# Altium PCB Concentrator.PcbDoc
Units mm, origin at the board's own origin, x right, y up, seen from the top; angles counter-clockwise.
Board outline 100 x 85 mm, 2 copper layers (Top Layer, Bottom Layer); 77 components, 63 nets, 269 pads, 33 vias.
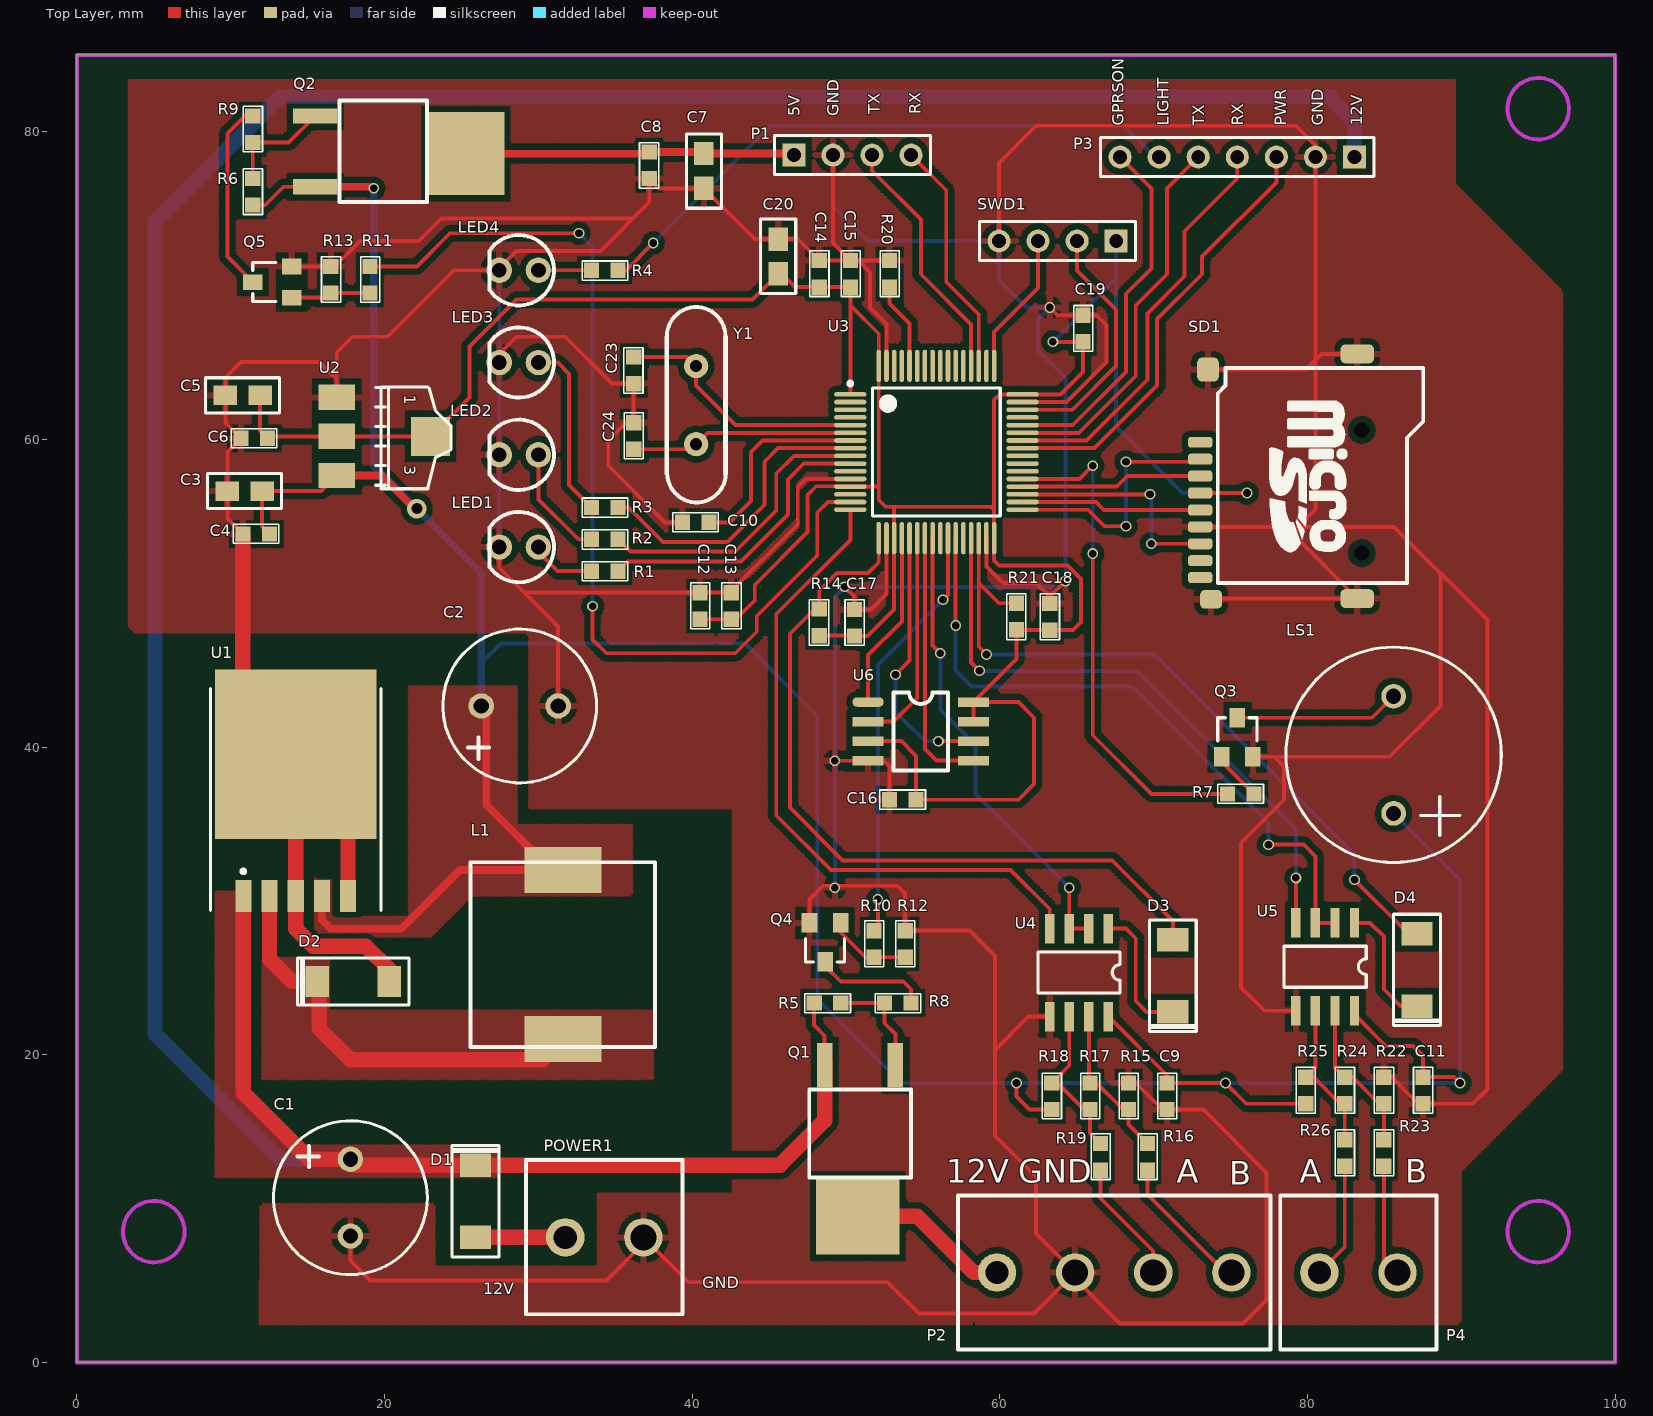
[diagram p0: Top Layer view]
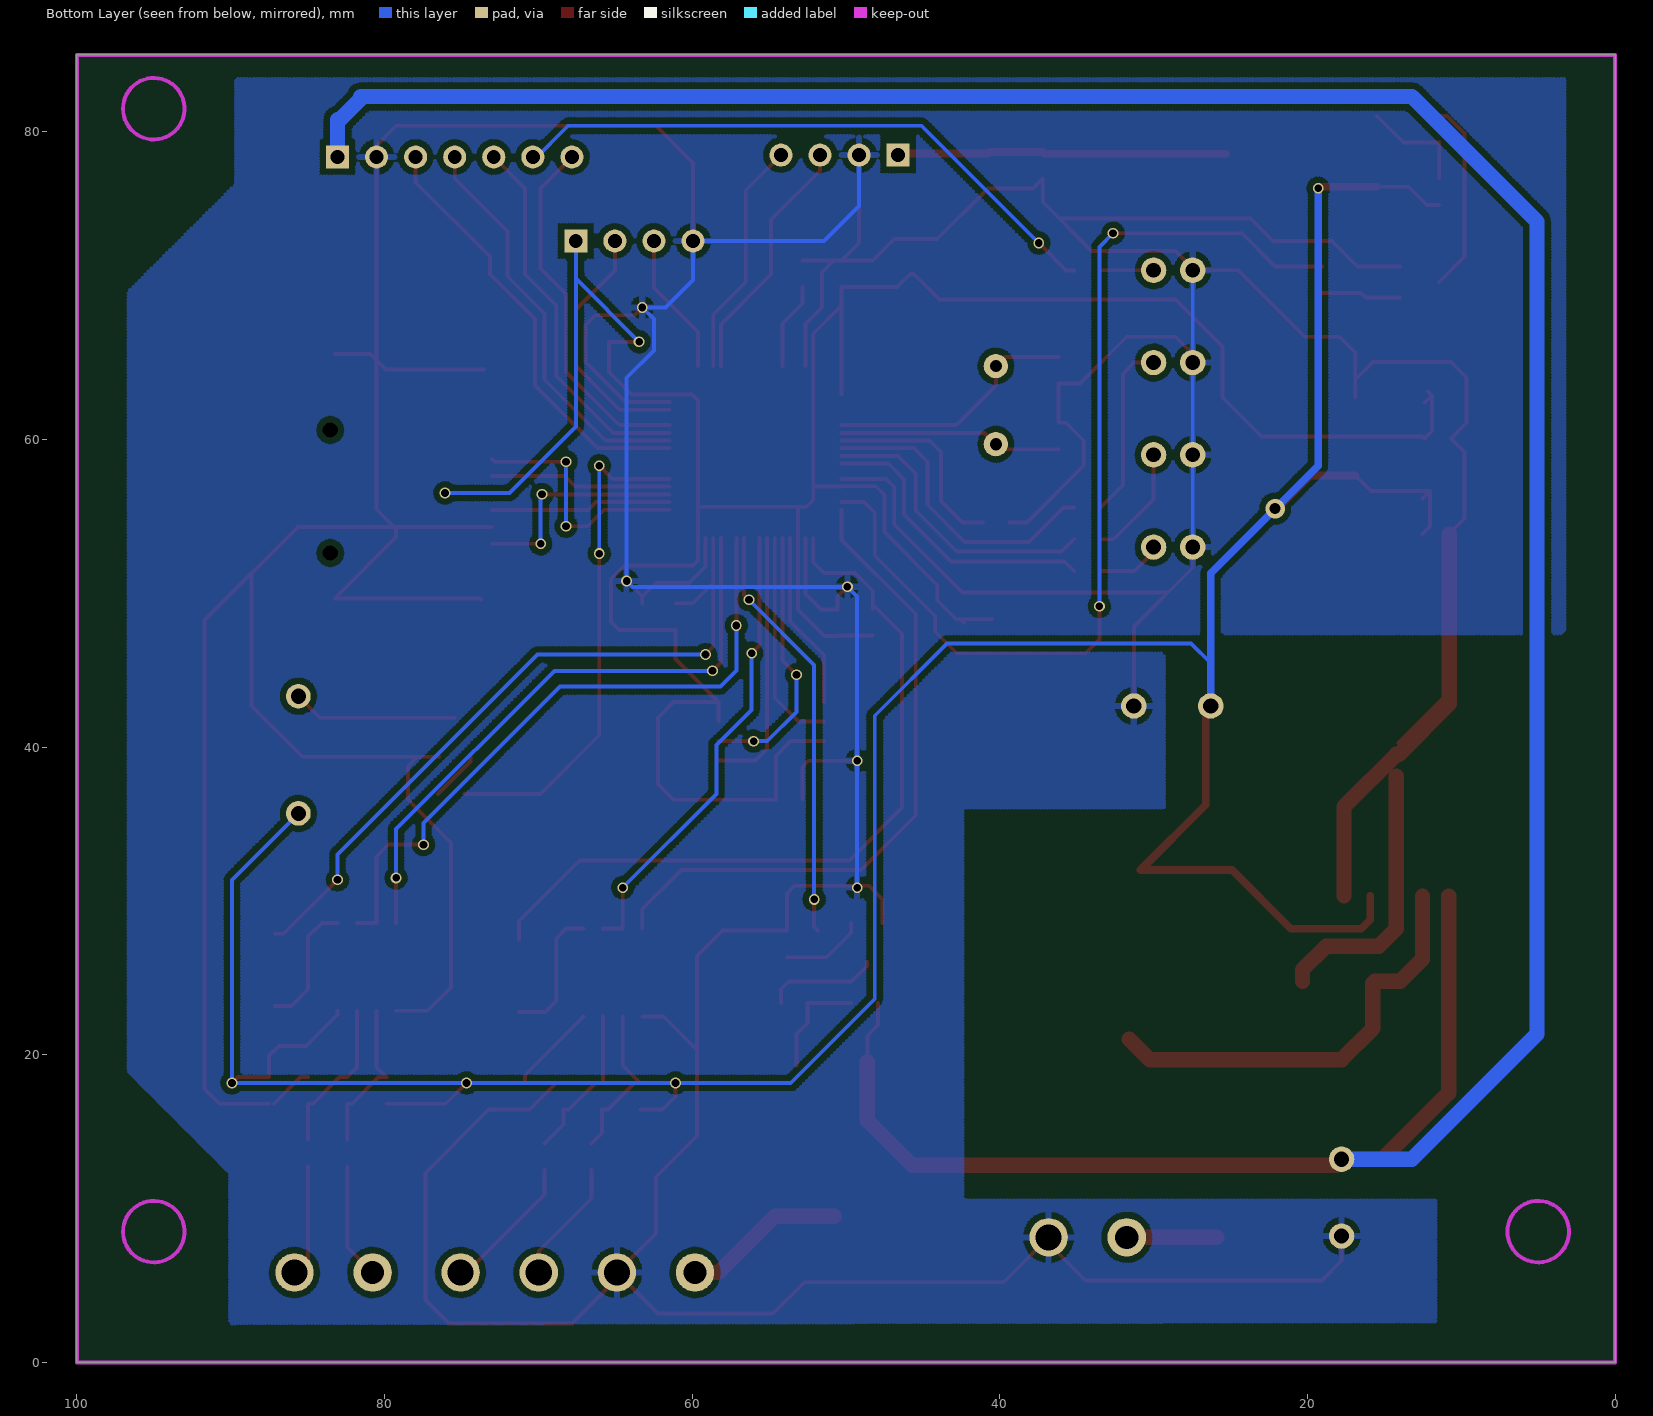
[diagram p1: Bottom Layer view, seen from below]

## Layer stack, top to bottom
Top Layer: signal copper 0.0356
Dielectric: dielectric 0.32, FR-4, Dk 4.8
Bottom Layer: signal copper 0.0356

## Board outline
0,0 0,85 100,85 100,0

## Design rules (kind name [scope] priority, off if disabled: settings)
Clearance [All] p1: gap=0.2
ComponentClearance [All] p1: gap=0.254 collisioncheckmode=3 verticalgap=0.254
PolygonConnect [All] p1: connectstyle=Relief reliefconductorwidth=0.4 reliefentries=4 polygonreliefangle="90 Angle"
RoutingVias [All] p1: holewidth=0.711 width=1.27 viastyle="Through Hole" minholewidth=0.5 minwidth=0.7 maxholewidth=0.711 maxwidth=1.27
SolderMaskExpansion [All] p1: expansion=0.102
TestPointUsage [All] p1: valid=0 allowmultiple=FALSE
Testpoint [All] p1: side=15 testpointundercomponent=TRUE minsize=1.016 maxsize=2.54 preferedsize=1.524 minholesize=0 maxholesize=1.016 preferedholesize=0.813 testpointgrid=0.025 style=1023 order=0-112345678
Width [All] p1: maxlimit=1 minlimit=0.2 preferedwidth=0.254
18 further rules are at their usual default settings.

## Components (designator, comment, footprint, x,y, rotation, side; value= is the part's Value field where it differs from the comment)
C1 "Cap Pol1" "C_DJ - duplicate" 17.78,13.208 r90 top
C2 "Cap Pol1" "C_DJ - duplicate" 26.289,42.672 r180 top
C3 "Cap" 0805 9.779,56.642 r0 top
C4 "Cap" 0603 10.795,53.848 r180 top
C5 "Cap" 0805 9.652,62.865 r0 top
C6 "Cap" 0603 10.668,60.071 r180 top
C7 "Cap" 0805 40.767,76.327 r90 top
C8 "Cap" 0603 37.211,76.962 r270 top
C9 "Cap" 0603 70.866,18.161 r90 top
C10 "Cap" 0603 39.37,54.61 r180 top
C11 "Cap" 0603 87.503,18.542 r90 top
C12 "Cap" 0603 40.513,50.038 r90 top
C13 "Cap" 0603 42.545,50.038 r90 top
C14 "Cap" 0603 48.26,71.628 r90 top
C15 "Cap" 0603 50.292,71.628 r90 top
C16 "Cap" 0603 52.832,36.576 r180 top
C17 "Cap" 0603 50.546,48.946 r90 top
C18 "Cap" 0603 63.246,49.327 r90 top
C19 "Cap" 0603 65.405,68.072 r90 top
C20 "Cap" 0805 45.593,73.025 r270 top
C23 "Cap" 0603 36.195,63.627 r270 top
C24 "Cap" 0603 36.195,61.087 r90 top
D1 "Diode 1N4007" M7-4007 25.908,8.128 r90 top
D2 "SS34" M7-4007 20.32,24.765 r180 top
D3 "M7" M7-4007 71.247,27.483 r270 top
D4 "M7" M7-4007 87.122,27.864 r270 top
L1 "Inductor" L12*12 37.592,32.512 r180 top
LED1 "LED" LED 30,53 r180 top
LED2 "LED" LED 30,59 r180 top
LED3 "LED" LED 30,65 r180 top
LED4 "LED" LED 30,71 r180 top
LS1 "Beep" BUZZER 85.598,43.307 r90 top
P1 "Header 4" HDR1X4 46.609,78.486 r0 top
P2 "Header 4" P4 59.817,5.842 r0 top
P3 "Header 7" HDR1X7 83.058,78.359 r180 top
P4 "Header 2" P2 80.772,5.842 r0 top
POWER1 "Header 2" P2 31.75,8.128 r0 top
Q1 "PMOS-2" 78M05/20 53.213,19.304 r180 top
Q2 "PMOS-2" 78M05/20 15.494,81.026 r270 top
Q3 "2N3904" NPN-PNP 74.422,39.37 r0 top
Q4 "2N3904" NPN-PNP 49.657,28.575 r180 top
Q5 "2N3904" NPN-PNP 13.97,69.215 r90 top
R1 "Res2" 0603 35.179,51.435 r0 top
R2 "Res2" 0603 35.179,53.509 r0 top
R3 "Res2" 0603 35.179,55.584 r0 top
R4 "Res2" 0603 35.179,70.993 r0 top
R5 "Res2" 0603 49.657,23.368 r0 top
R6 "Res2" 0603 11.43,76.962 r90 top
R7 "Res2" 0603 74.803,36.957 r180 top
R8 "Res2" 0603 54.229,23.368 r0 top
R9 "Res2" 0603 11.43,81.026 r90 top
R10 "Res2" 0603 51.816,28.067 r90 top
R11 "Res2" 0603 19.05,71.247 r90 top
R12 "Res2" 0603 53.848,28.067 r90 top
R13 "Res2" 0603 16.51,71.247 r90 top
R14 "Res2" 0603 48.26,47.244 r270 top
R15 "Res2" 0603 68.368,18.161 r90 top
R16 "Res2" 0603 69.596,14.224 r90 top
R17 "Res2" 0603 65.871,18.161 r90 top
R18 "Res2" 0603 63.373,18.161 r90 top
R19 "Res2" 0603 66.548,14.224 r90 top
R20 "Res2" 0603 52.832,71.628 r90 top
R21 "Res2" 0603 61.087,47.625 r270 top
R22 "Res2" 0603 84.963,18.542 r90 top
R23 "Res2" 0603 84.963,14.478 r90 top
R24 "Res2" 0603 82.423,18.542 r90 top
R25 "Res2" 0603 79.883,18.542 r90 top
R26 "Res2" 0603 82.423,14.478 r90 top
SD1 "SD_Card_TF" SD_Card_TF 73.025,59.817 r270 top
SWD1 "SWD" HDR1X4 67.564,72.898 r180 top
U1 "LM2596S-5.0" TO-263-5 14.224,34.544 r0 top
U2 "AMS1117-3.3" AMS-1117 16.891,62.738 r270 top
U3 "STM32F103RBT6" LQFP64_M 55.88,59.182 r0 top
U4 "SP485" SOP8 67.056,28.194 r180 top
U5 "SP485" SOP8 83.058,28.575 r180 top
U6 "W25X16" W24X16 51.435,42.926 r0 top
Y1 "XTAL" OSC 40.259,59.69 r270 top

## Footprints (in the part's own frame and the unit in brackets; to place one, negate y for a bottom-side part, rotate by r counter-clockwise, add the part's x,y. Pads: shape width x height; smd on the part's side, far side on the other; paste and mask are expansions set on the pad)
78M05/20 [mm]
  rect 1x2.9 smd: 1(0,0) 3(4.6,0)
  rect 5.4x5 smd: 2(2.45,9.8)
  silkscreen extent -1,1.57 5.6,7.27
0603 [mil]
  rect 39x39 smd: 1(0,0) 2(-68,0)
  silkscreen extent -92,-25 25,24
0805 [mil]
  rect 60x50 smd: 1(0,0) 2(89.02,0)
  silkscreen extent -51,-45 139,45
AMS-1117 [mil]
  rect 65x94.49 smd: 1(0,0) 2(100,0) 3(200,0)
  rect 100x100 smd: 4(100,240)
  silkscreen extent -26,100 234,293
BUZZER [mm]
  round 1.6 hole 0.991: 1(0,0) 2(-7.62,0)
  silkscreen extent -10.81,-7 3.19,7
"C_DJ - duplicate" [mil]
  round 65 hole 39: 1(0,0) 2(-196.85,0)
  silkscreen extent -295,-197 98,197
HDR1X4 [mm] "Connector; Header; 4 Position"
  rect 1.5x1.5 hole 0.9: 1(0,0)
  round 1.5 hole 0.9: 2(2.54,0) 3(5.08,0) 4(7.62,0)
  silkscreen extent -1.27,-1.27 8.89,1.27
HDR1X7 [mm] "Connector; Header; 7 Position"
  rect 1.5x1.5 hole 0.9: 1(0,0)
  round 1.5 hole 0.9: 2(2.54,0) 3(5.08,0) 4(7.62,0) 5(10.16,0) 6(12.7,0) 7(15.24,0)
  silkscreen extent -1.27,-1.27 16.51,1.27
L12*12 [mm]
  rect 5x3 smd: 1(6,11.5) 2(6,0.5)
  silkscreen extent 0,0 12,12
LED [mil]
  round 65 hole 38: A(0,0) K(100,0)
  silkscreen extent -40,-90 125,90
LQFP64_M [mm] "Thin QFP, 64-Leads, Body 10x10mm, Pitch 0.5mm, IPC Low Density"
  oval 2.1x0.3 smd: 1(-5.6,3.75) 2(-5.6,3.25) 3(-5.6,2.75) 4(-5.6,2.25) 5(-5.6,1.75) 6(-5.6,1.25) 7(-5.6,0.75) 8(-5.6,0.25) 9(-5.6,-0.25) 10(-5.6,-0.75) 11(-5.6,-1.25) 12(-5.6,-1.75) 13(-5.6,-2.25) 14(-5.6,-2.75) 15(-5.6,-3.25) 16(-5.6,-3.75) 33(5.6,-3.75) 34(5.6,-3.25) 35(5.6,-2.75) 36(5.6,-2.25) 37(5.6,-1.75) 38(5.6,-1.25) 39(5.6,-0.75) 40(5.6,-0.25) 41(5.6,0.25) 42(5.6,0.75) 43(5.6,1.25) 44(5.6,1.75) 45(5.6,2.25) 46(5.6,2.75) 47(5.6,3.25) 48(5.6,3.75)
  oval 0.3x2.1 smd: 17(-3.75,-5.6) 18(-3.25,-5.6) 19(-2.75,-5.6) 20(-2.25,-5.6) 21(-1.75,-5.6) 22(-1.25,-5.6) 23(-0.75,-5.6) 24(-0.25,-5.6) 25(0.25,-5.6) 26(0.75,-5.6) 27(1.25,-5.6) 28(1.75,-5.6) 29(2.25,-5.6) 30(2.75,-5.6) 31(3.25,-5.6) 32(3.75,-5.6) 49(3.75,5.6) 50(3.25,5.6) 51(2.75,5.6) 52(2.25,5.6) 53(1.75,5.6) 54(1.25,5.6) 55(0.75,5.6) 56(0.25,5.6) 57(-0.25,5.6) 58(-0.75,5.6) 59(-1.25,5.6) 60(-1.75,5.6) 61(-2.25,5.6) 62(-2.75,5.6) 63(-3.25,5.6) 64(-3.75,5.6)
  silkscreen extent -5.72,-4.15 4.15,4.57, body extent -5,-5 5,5, height 1.6
M7-4007 [mil]
  rect 60x80 smd: 1(0,0) 2(185,0)
  silkscreen extent -50,-60 235,60
NPN-PNP [mil]
  rect 40x50 smd: B(0,0) C(40,100) E(80,0)
  silkscreen extent -10,40 90,100
OSC [mil]
  round 62 hole 31: 1(0,0) 2(-200,0)
  silkscreen extent -351,-75 149,76
P2 [mm]
  round 2.5 hole 1.5: 1(0,0)
  round 2.5 hole 1.7: 2(5.08,0)
  silkscreen extent -2.54,-5 7.62,5.02
P4 [mm]
  round 2.5 hole 1.5: 1(0,0)
  round 2.5 hole 1.7: 2(5.08,0) 3(10.16,0) 4(15.24,0)
  silkscreen extent -2.54,-5 17.78,5.02
SD_Card_TF [mil]
  rrect50% 48x86 smd: 0(-226,402) 0(400,402)
  rrect50% 62x56 smd: 0(-186,20)
  round 30 hole 39.37 mask+0: 0(-31.5,413.39) 0(283.46,413.39)
  rrect50% 48x56 smd: 0(402,28)
  rrect50% 28x62 smd: 1(0,0) 2(43.31,0) 3(86.61,0) 4(129.92,0) 5(173.23,0) 6(216.54,0) 7(259.84,0) 8(303.15,0) 9(346.46,0)
  silkscreen extent -190,45 360,571, body extent -235,-27 407,572, height 79
SOP8 [mil]
  rect 24x76 smd: 1(0,0) 2(50,0) 3(100,0) 4(150,0) 5(150,225) 6(100,225) 7(50,225) 8(0,225)
  silkscreen extent -30,60 180,165
TO-263-5 [mm]
  rect 1.05x2.1 smd: 1(-3.4,-4.225) 2(-1.7,-4.225) 3(0,-4.225) 4(1.7,-4.225) 5(3.4,-4.225)
  rect 10.5x11 smd: 6(0,4.987)
  silkscreen extent -5.55,-5.18 5.55,9.28, body extent -5.33,-4.7 5.33,10.29, height 3
W24X16 [mil]
  oval 80x24 smd: 1(0,0)
  rect 80x24 smd: 2(0,-50.06) 3(0,-100.06) 4(0,-150.06) 5(270,-150) 6(270,-100) 7(270,-50) 8(270,0)
  silkscreen extent 65,-175 205,25

## Part data
C1 C2: "Polarized Capacitor (Radial)"
C3 C4 C5 C6 C7 C8 C9 C10 C11 C12 C13 C14 C15 C16 C17 C18 C19 C20 C23 C24: "Capacitor"
D1: "1 Amp General Purpose Rectifier"
D2 D3 D4: library part "Diode 1N4007", "1 Amp General Purpose Rectifier"
LED1 LED2 LED3 LED4: library part LED0, "Typical INFRARED GaAs LED"
LS1: library part Bell, "Electrical Bell"
P1 P2: "Header, 4-Pin"
P3: "Header, 7-Pin"
P4 POWER1: "Header, 2-Pin"
Q1 Q2: "P-Channel Power MOSFET"
Q3 Q4 Q5: "NPN General Purpose Amplifier"
R1 R2 R3 R4 R5 R6 R7 R8 R9 R10 R11 R12 R13 R14 R15 R16 R17 R18 R19 R20 R21 R22 R23 R24 R25 R26: "Resistor"
SD1: "SD"
SWD1: library part "Header 4", "Header, 4-Pin"
U1: "5V稳压芯片"
U3: "STM32 ARM-based 32-bit MCU with 128 Kbytes Flash, 64-pin LQFP, Industrial Temperature"
U4 U5: library part Pro55.tmp_SP485_20
U6: library part W24X16
Y1: "Crystal Oscillator"

## Via types
v1: diameter 0.7, hole 0.5, Top Layer to Bottom Layer, 32 vias
v2: diameter 1.27, hole 0.711, Top Layer to Bottom Layer, 1 vias

## Nets (pads, with @x,y where several pads share a name; then routed paths per layer and width w, separated by ;. In a path a pad name is that pad's centre, name@x,y a point inside that pad or via, vN(x,y) a via of type N, cw(c..) or ccw(c..) an arc to the next point about the centre after c; other vN are vias at no path point)
12V/485: P2.1 Q1.2 | length 10.6
  Top Layer w1: Q1.2 54.631,9.504 58.293,5.842 P2.1
485_CTRL: U3.27 U5.2 U5.3 | length 43.4
  Top Layer w0.254: v1(57.13,47.899) U3.27 ; v1(77.47,33.655) 79.756,33.655 80.518,32.893 U5.3 U5.2
  Bottom Layer w0.254: v1(57.13,47.899) 57.13,44.978 58.166,43.942 68.58,43.942 77.47,35.052 v1(77.47,33.655)
485_CTRL2: U3.24 U4.2 U4.3 | length 30.3
  Top Layer w0.254: U3.24 55.63,46.605 v1(56.134,46.101) ; v1(64.516,30.861) U4.3 U4.2
  Bottom Layer w0.254: v1(56.134,46.101) 56.134,42.418 58.42,40.132 58.42,36.957 v1(64.516,30.861)
485A: P4.1 R26.2 | length 7.6
  Top Layer w0.254: P4.1 82.423,7.493 R26.2
485A2: P2.3 R19.2 | length 8.1
  Top Layer w0.254: R19.2 66.548,10.668 69.977,7.239 P2.3
485B: P4.2 R23.2 | length 7.3
  Top Layer w0.254: R23.2 84.963,6.731 P4.2
485B2: P2.4 R16.2 | length 9.1
  Top Layer w0.254: R16.2 69.596,10.922 74.676,5.842 P2.4
485POW_CTRL: R10.1 U3.26 | length 27.5
  Top Layer w0.254: R10.1 52.07,28.321 v1(52.07,30.099) ; v1(56.307,49.576) 56.63,49.899 U3.26
  Bottom Layer w0.254: v1(52.07,30.099) 52.07,45.339 v1(56.307,49.576)
BEEP: R7.1 U3.37 | length 32.8
  Top Layer w0.254: U3.37 65.179,57.432 v1(66.04,58.293) ; v1(66.04,52.578) 66.04,40.767 69.85,36.957 R7.1
  Bottom Layer w0.254: v1(66.04,52.578) v1(66.04,58.293)
GND: C1.2 C2.2 C3.1 C4.1 C5.1 C6.1 C7.1 C8.1 C9.2 C10.1 C11.2 C12.1 C13.1 C14.1 C15.1 C16.1 C17.1 C18.1 C19.1 C20.1 C23.1 C24.1 D2.1 LED1.K LED2.K LED3.K LED4.K P1.2 P2.2 P3.2 POWER1.2 Q3.E Q4.E Q5.E R12.1 R13.1 R15.1 R20.1 R22.1 SD1.0@73.533,64.541 SD1.0@73.736,49.606 SD1.0@83.236,49.657 SD1.0@83.236,65.557 SD1.6 SWD1.4 U1.3 U1.5 U1.6 U2.1 U3.12 U3.18 U3.31 U3.47 U3.63 U4.5 U5.5 U6.4 | length 655.4
  Top Layer w0.254: U1.6@10.795,43.561 U1.6@14.097,40.259 ; C4.1 9.779,54.864 9.779,59.182 C6.1 9.652,61.087 9.652,64.008 10.668,65.024 15.748,65.024 16.891,63.881 ; Q5.E 16.764,71.247 18.415,72.898 22.225,72.898 23.685,74.358 36.131,74.358 ; U2.1 16.891,65.659 17.907,66.675 20.193,66.675 24.518,71 LED4.K 27.46,71.148 28.575,72.263 34.036,72.263 37.211,75.438 C8.1 37.846,76.327 C7.1 44.069,73.025 46.863,73.025 C14.1 R20.1 ; C1.2 17.78,6.604 19.05,5.334 34.417,5.334 36.83,7.747 POWER1.2 39.751,5.207 52.705,5.207 54.737,3.175 62.23,3.175 P2.2 ; LED1.K 27.46,51.661 31.289,47.832 C2.2 C2.2@31.369,42.752 ; LED3.K 27.46,65.56 28.575,66.675 31.75,66.675 34.798,63.627 C23.1 C24.1 35.687,61.087 34.544,59.944 34.544,58.293 38.227,54.61 C10.1 ; 29.083,50.038 42.418,50.038 46.863,54.483 46.863,56.896 47.399,57.432 U3.12 ; Q4.E 47.625,30.099 48.514,30.988 53.34,30.988 53.848,30.48 R12.1 58.039,28.067 59.69,26.416 59.69,14.732 62.357,12.065 62.357,8.382 P2.2 ; P1.2 49.149,72.771 C15.1 ; v1(49.276,39.116) 49.278,39.114 52.453,39.114 52.832,38.735 C16.1 ; v1(49.911,50.419) 50.546,49.784 C17.1@50.546,48.895 ; C17.1 51.613,48.946 52.63,49.963 U3.18 ; 50.8,71.628 51.562,70.866 51.562,68.58 52.63,67.512 U3.63 ; U3.31 59.13,51.741 60.198,50.673 62.357,50.673 C18.1@63.246,49.784 ; 59.69,20.32 61.849,22.479 U4.5 ; SWD1.4 59.944,77.978 62.357,80.391 79.248,80.391 80.518,79.121 ; U3.47 64.337,62.432 66.929,65.024 66.929,67.437 66.294,68.072 63.754,68.072 v1(63.246,68.58) ; C18.1 C18.1@63.246,49.784 ; v1(64.262,50.8) C18.1@63.246,49.784 ; R15.1 68.834,18.161 70.561,16.434 73.228,16.434 77.343,12.319 77.343,4.064 75.819,2.54 67.818,2.54 64.897,5.461 P2.2 ; SD1.6 85.637,54.317 91.694,48.26 91.694,17.78 90.729,16.815 C11.2 ; SD1.0@73.533,64.541 79.908,64.541 80.924,65.557 SD1.0@83.236,65.557 ; SD1.0@73.736,49.606 73.787,49.657 83.236,49.657 79.248,53.645 79.248,54.317 ; Q3.E 85.344,39.37 88.646,42.672 88.646,51.308 ; 77.851,39.37 78.486,38.735 78.486,36.576 75.692,33.782 75.692,24.384 77.216,22.86 U5.5 ; 79.375,54.317 80.518,55.46 P3.2 ; R22.1 85.471,18.542 C11.2@87.198,16.815
  Top Layer w1: C4.1 10.795,42.799 U1.6@14.097,39.497 ; U1.6@14.224,38.1 14.224,28.194 15.367,27.051 18.796,27.051 20.32,25.527 D2.1 ; U1.6 17.624,36.131 U1.5
  Bottom Layer w0.254: LED1.K LED4.K ; P1.2 49.149,75.184 51.435,72.898 SWD1.4 59.944,70.358 61.722,68.58 v1(63.246,68.58) 62.484,67.818 62.484,65.786 64.262,64.008 v1(64.262,50.8) 63.881,50.419 v1(49.911,50.419) 49.276,49.784 v1(49.276,30.861)
GPRS_RX: P3.4 U3.42 | length 26.6
  Top Layer w0.254: U3.42 65.647,59.932 69.596,63.881 69.596,68.199 72.009,70.612 72.009,73.533 75.438,76.962 P3.4
GPRS_TX: P3.5 U3.43 | length 24.8
  Top Layer w0.254: U3.43 65.131,60.432 68.834,64.135 68.834,68.707 70.866,70.739 70.866,76.327 P3.5
GPRSPWR_CTRL: P3.3 U3.41 | length 28.5
  Top Layer w0.254: U3.41 66.163,59.432 70.231,63.5 70.231,67.818 73.152,70.739 73.152,71.882 77.978,76.708 P3.3
GPRSPWRKEY: P3.7 U3.44 | length 23.6
  Top Layer w0.254: U3.44 64.742,60.932 68.199,64.389 68.199,69.469 69.85,71.12 69.85,76.327 P3.7
LED1: R1.1 U3.10 | length 19.3
  Top Layer w0.254: R1.1 35.814,52.07 43.18,52.07 46.228,55.118 46.228,57.404 47.256,58.432 U3.10
LED2: R2.1 U3.9 | length 19.4
  Top Layer w0.254: R2.1 35.983,52.705 42.799,52.705 45.466,55.372 45.466,57.785 46.613,58.932 U3.9
LED3: R3.1 U3.8 | length 20.2
  Top Layer w0.254: R3.1 35.856,55.584 38.1,53.34 42.291,53.34 44.704,55.753 44.704,58.547 45.589,59.432 U3.8
LORA_5V: C7.2 C8.2 P1.1 Q2.2 | length 27.6
  Top Layer w0.254: C7.2@40.869,78.486 C7.2 ; P1.1 46.507,78.588 C7.2 ; C7.2 40.666,78.689 C7.2
  Top Layer w0.5: Q2.2 37.098,78.576 C8.2 40.666,78.689 C7.2 P1.1@46.507,78.588
LORA_RX: P1.4 U3.51 | length 15.5
  Top Layer w0.254: P1.4 56.515,76.2 56.515,70.231 58.63,68.116 U3.51
LORA_TX: P1.3 U3.52 | length 16.4
  Top Layer w0.254: P1.3 51.689,77.47 54.864,74.295 54.864,70.739 58.13,67.473 U3.52
LORAPOW_CTRL: R11.1 U3.15 | length 64.7
  Top Layer w0.254: R11.1 22.098,71.247 24.257,73.406 v1(32.639,73.406) ; v1(33.528,49.149) 33.528,46.99 34.417,46.101 42.799,46.101 44.196,47.498 44.196,48.514 48.133,52.451 48.133,55.245 48.82,55.932 U3.15
  Bottom Layer w0.254: v1(32.639,73.406) 33.528,72.517 v1(33.528,49.149)
NetC10_2: C10.2 U3.7 | length 13.3
  Top Layer w0.254: C10.2 42.418,54.61 43.815,56.007 43.815,59.182 44.577,59.944 50.268,59.944 U3.7
NetC23_2: C23.2 U3.5 Y1.2 | length 16.7
  Top Layer w0.254: C23.2 39.675,65.354 Y1.2 40.259,63.5 42.827,60.932 U3.5
NetC24_2: C24.2 U3.6 Y1.1 | length 14.5
  Top Layer w0.254: C24.2 39.929,59.36 41.001,60.432 U3.6
NetD1_1: D1.1 POWER1.1 | length 5.8
  Top Layer w1: D1.1 POWER1.1
NetD2_2: D2.2 L1.1 U1.2 | length 28.1
  Top Layer w1: U1.2 12.524,26.211 13.97,24.765 D2.2 15.748,24.638 15.748,21.717 17.78,19.685 30.265,19.685 L1.1
NetD3_2: D3.2 U4.1 | length 8.8
  Top Layer w0.254: U4.1 68.199,28.194 68.834,27.559 68.834,23.495 69.545,22.784 D3.2
NetD4_2: D4.2 U5.1 | length 8.3
  Top Layer w0.254: U5.1 84.074,28.575 84.963,27.686 84.963,24.257 86.055,23.165 D4.2
NetLED1_A: LED1.A R1.2 | length 4.3
  Top Layer w0.254: LED1.A 30,52.677 31.242,51.435 R1.2
NetLED2_A: LED2.A R2.2 | length 7.4
  Top Layer w0.254: LED2.A 30,56.106 32.597,53.509 R2.2
NetLED3_A: LED3.A R3.2 | length 11.6
  Top Layer w0.254: LED3.A 31.266,65 32.004,64.262 32.004,57.031 R3.2
NetLED4_A: LED4.A R4.2 | length 3.5
  Top Layer w0.254: LED4.A 33.445,71 R4.2
NETLIGHT: P3.6 R4.1 | length 40.4
  Top Layer w0.254: R4.1 35.687,70.993 v1(37.465,72.771)
  Bottom Layer w0.254: v1@37.401,72.707 45.085,80.391 68.072,80.391 70.358,78.105 P3.6
NetLS1_1: LS1.1 Q3.C | length 10.7
  Top Layer w0.254: Q3.C 84.201,41.91 LS1.1
NetQ1_1: Q1.1 R5.1 R8.2 | length 7.2
  Top Layer w0.254: R5.1 R8.2 52.502,22.047 53.213,21.336 Q1.1
NetQ2_1: Q2.1 R6.1 R9.2 | length 7.1
  Top Layer w0.254: R6.1 R9.2 13.767,79.299 Q2.1
NetQ3_B: Q3.B R7.2 | length 3.3
  Top Layer w0.254: Q3.B 74.422,39.065 R7.2
NetQ4_B: Q4.B R10.2 R12.2 | length 5.5
  Top Layer w0.254: Q4.B 49.657,27.94 51.257,26.34 R12.2
NetQ4_C: Q4.C R8.1 | length 7.4
  Top Layer w0.254: Q4.C 48.641,25.781 49.657,24.765 53.721,24.765 54.229,24.257 R8.1
NetQ5_B: Q5.B R11.2 R13.2 | length 5.2
  Top Layer w0.254: Q5.B 16.205,69.215 R13.2 R11.2
NetQ5_C: Q5.C R9.1 | length 12.5
  Top Layer w0.254: Q5.C 9.779,71.882 9.779,79.883 10.922,81.026 R9.1
NetR15_2: R15.2 R16.1 R17.1 U4.7 | length 10.3
  Top Layer w0.254: U4.7 65.786,18.246 R17.1 66.294,18.161 68.021,16.434 R15.2 68.368,15.452 R16.1
NetR17_2: R17.2 R18.1 R19.1 U4.6 | length 10.5
  Top Layer w0.254: U4.6 64.516,19.304 R18.1 63.754,18.161 65.481,16.434 R17.2 65.871,14.901 R19.1
NetR20_2: R20.2 U3.60 | length 5.7
  Top Layer w0.254: R20.2 52.832,68.834 54.13,67.536 U3.60
NetR22_2: R22.2 R23.1 R24.1 U5.7 | length 10.2
  Top Layer w0.254: U5.7 81.788,19.177 R24.1 82.931,18.542 84.658,16.815 R22.2 R23.1
NetR24_2: R24.2 R25.1 R26.1 U5.6 | length 10.2
  Top Layer w0.254: U5.6 80.518,19.177 R25.1 80.391,18.542 82.118,16.815 R24.2 R26.1
SPI1_MISO: U3.22 U6.2 | length 14.2
  Top Layer w0.254: U6.2 53.084,41.654 54.63,43.2 U3.22
SPI1_MOSI: U3.23 U6.5 | length 17.2
  Top Layer w0.254: U3.23 55.13,39.866 55.88,39.116 U6.5
SPI1_NSS: U3.20 U6.1 | length 11.6
  Top Layer w0.254: U6.1 51.435,45.974 53.63,48.169 U3.20
SPI1_SCK: U3.21 U6.6 | length 17.5
  Top Layer w0.254: v1(53.213,44.704) 54.13,45.621 U3.21 ; v1(56.007,40.386) U6.6
  Bottom Layer w0.254: v1(53.213,44.704) 53.213,42.291 55.118,40.386 v1(56.007,40.386)
SPI2_MISO: SD1.7 U3.35 | length 14.7
  Top Layer w0.254: U3.35 v1(69.767,56.432) ; v1(69.85,53.213) 69.854,53.217 SD1.7
  Bottom Layer w0.254: v1(69.767,56.432) 69.85,56.349 v1(69.85,53.213)
SPI2_MOSI: SD1.3 U3.36 | length 11.8
  Top Layer w0.254: U3.36 67.6,56.932 68.285,57.617 SD1.3
SPI2_NSS: SD1.2 U3.33 | length 16.3
  Top Layer w0.254: U3.33 65.726,55.432 66.802,54.356 v1(68.199,54.356) ; v1(68.199,58.547) 72.855,58.547 SD1.2
  Bottom Layer w0.254: v1(68.199,54.356) v1(68.199,58.547)
SPI2_SCK: SD1.5 U3.34 | length 11.8
  Top Layer w0.254: U3.34 66.242,55.932 66.757,55.417 SD1.5
SWCLK: SWD1.3 U3.49 | length 9.3
  Top Layer w0.254: U3.49 59.63,66.996 62.484,69.85 SWD1.3
SWDIO: SWD1.2 U3.46 | length 16.4
  Top Layer w0.254: U3.46 64.726,61.932 67.564,64.77 67.564,68.453 65.024,70.993 SWD1.2
USART2_RX: D3.1 R14.2 U3.17 | length 50.3
  Top Layer w0.254: R14.2@48.108,49.124 46.355,47.371 46.355,36.068 49.784,32.639 67.31,32.639 71.247,28.702 D3.1 ; R14.2 48.26,50.165 49.403,51.308 51.435,51.308 52.13,52.003 U3.17
USART2_TX: U3.16 U4.4 | length 43.4
  Top Layer w0.254: U3.16 50.28,53.455 45.466,48.641 45.466,35.56 49.022,32.004 60.706,32.004 63.246,29.464 U4.4
USART3_RX: D4.1 R21.2 U3.30 | length 47.2
  Top Layer w0.254: 58.63,50.673 59.951,49.352 R21.2 ; U3.30 58.63,46.526 v1(59.14,46.016) ; v1(83.058,31.369) 86.563,27.864 D4.1
  Bottom Layer w0.254: v1(59.14,46.016) 70.062,46.016 83.058,33.02 v1(83.058,31.369)
USART3_TX: U3.29 U5.4 | length 39.8
  Top Layer w0.254: U3.29 58.13,45.502 v1(58.674,44.958) ; U5.4 v1(79.248,31.496)
  Bottom Layer w0.254: v1(58.674,44.958) 68.961,44.958 79.248,34.671 v1(79.248,31.496)
VCC_3.3: C5.2 C6.2 C12.2 C13.2 C14.2 C15.2 C16.2 C17.2 C18.2 C19.2 C20.2 R14.1 R21.1 SD1.4 SWD1.1 U2.2 U2.4 U3.1 U3.13 U3.19 U3.32 U3.48 U3.64 U6.3 U6.7 U6.8 | length 202.2
  Top Layer w0.254: C5.2@12.167,63.119 C5.2 ; C6.2 11.913,60.553 C5.2 ; C5.2@12.395,62.383 C5.2 ; C6.2@12.522,60.198 U2.4 25.527,62.738 25.527,66.04 28.575,69.088 43.917,69.088 C20.2 45.822,70.764 46.685,69.901 C15.2 C15.2@50.292,69.889 ; C12.2 42.85,48.311 44.069,49.53 44.069,50.546 47.498,53.975 47.498,56.388 48.065,56.955 50.303,56.955 U3.13 51.972,56.932 52.13,57.09 ; C13.2@42.327,48.093 C13.2 ; R14.1 50.521,47.244 C17.2 51.41,47.219 53.13,48.939 53.13,55.582 ; U3.1 C15.2@50.28,69.889 ; 50.292,68.707 52.13,66.869 52.13,56.074 52.578,55.626 59.436,55.626 59.63,55.432 ; U6.3 53.596,40.384 54.559,39.421 C16.2 61.214,36.576 62.23,37.592 62.23,41.91 61.214,42.926 U6.8 ; U6.7 U6.8 ; v1(63.449,66.345) C19.2 65.405,64.389 63.948,62.932 60.011,62.932 59.63,62.551 59.63,52.13 59.944,51.816 64.389,51.816 65.278,50.927 65.278,48.133 64.745,47.6 C18.2 63.221,47.625 R21.1 61.087,45.72 U6.8 ; SD1.4 76.071,56.517 v1(76.073,56.515)
  Bottom Layer w0.254: v1(63.449,66.345) 67.564,70.46 ; SWD1.1 67.564,60.833 71.882,56.515 v1(76.073,56.515)
VCC_5V: C2.1 C3.2 C4.2 C9.1 C11.1 L1.2 LS1.2 Q2.3 R6.2 R18.2 R25.2 U1.4 U2.3 U4.8 U5.8 | length 225.8
  Top Layer w0.254: R6.2 12.243,75.235 13.434,76.426 Q2.3 ; C4.2 12.04,54.33 C3.2 ; C3.2@12.522,56.16 C3.2 ; U2.3 15.875,56.642 C3.2 ; v1(61.087,18.161) 61.087,17.272 61.925,16.434 R18.2 ; U4.8 70.866,18.669 C9.1 v1(74.676,18.161) 76.022,16.815 R25.2 ; U5.8 83.058,22.606 85.09,20.574 86.868,20.574 87.503,19.939 C11.1 89.535,18.542 v1(89.916,18.161)
  Top Layer w0.5: Q2.3 19.205,76.426 v1(19.304,76.327) ; U1.4 15.924,28.78 16.51,28.194 21.082,28.194 24.9,32.012 30.853,32.012 26.609,36.256 26.609,42.352 C2.1 ; U2.3 19.812,57.658 21.971,55.499 v2(22.098,55.499)
  Bottom Layer w0.254: C2.1@26.035,42.545 C2.1@26.035,42.672 ; 26.289,45.466 27.559,46.736 43.434,46.736 48.133,42.037 48.133,23.622 53.594,18.161 v1(89.916,18.161) 89.916,31.369 LS1.2
  Bottom Layer w0.5: v1(19.304,76.327) 19.304,58.293 26.289,51.308 C2.1
VCC_12V: C1.1 D1.2 P3.1 Q1.3 R5.2 U1.1 | length 215.2
  Top Layer w0.254: R5.2 47.93,21.92 48.613,21.237 Q1.3
  Top Layer w1: U1.1 10.824,17.497 15.113,13.208 C1.1 18.161,12.827 45.72,12.827 48.613,15.72 Q1.3@48.613,19.558
  Bottom Layer w1: C1.1 13.208,13.208 5.08,21.336 5.08,74.168 13.208,82.296 81.534,82.296 ; 81.534,82.161 83.058,80.637 ; P3.1 83.058,80.772
pads on no net: SD1.0@83.525,52.617 SD1.0@83.525,60.617 SD1.1 SD1.8 SD1.9 U3.2 U3.3 U3.4 U3.11 U3.14 U3.25 U3.28 U3.38 U3.39 U3.40 U3.45 U3.50 U3.53 U3.54 U3.55 U3.56 U3.57 U3.58 U3.59 U3.61 U3.62

## Polygon pours and split planes (outlines as drawn)
GND on Top Layer "Top Layer-No Net" (hatched 90Degree grid 0.2 track 0.254, remove dead copper, pour order 1000): 3.429,83.312 89.535,83.312 89.535,76.581 94.361,71.755 96.52,69.596 96.52,54.864 96.52,19.05 91.186,13.716 89.916,12.446 89.916,4.191 89.916,2.54 85.852,2.54 73.406,2.54 11.811,2.54 11.938,2.667 11.938,5.461 33.782,5.461 33.909,5.334 33.909,12.319 33.909,30.988 29.972,34.925 29.464,35.433 29.464,47.244 29.21,47.498 9.779,47.498 3.81,47.498 3.429,47.879
NetD2_2 on Top Layer "Top Layer-No Net" (hatched 90Degree grid 0.2 track 0.203, pour order 1000): 12.065,26.289 12.065,19.304 12.065,18.415 13.208,18.415 35.56,18.415 37.465,18.415 37.465,22.86 16.383,22.86 16.383,26.289 12.065,26.289
VCC_5V on Top Layer "Top Layer-No Net" (hatched 90Degree grid 0.2 track 0.203, pour order 1001): 24.892,43.942 28.575,43.942 28.575,38.608 28.575,34.925 36.068,34.925 36.068,30.353 26.67,30.353 25.654,30.353 24.384,29.083 22.987,27.686 15.494,27.686 15.494,31.496 15.621,31.369 16.51,31.369 16.51,28.956 21.59,28.956 21.59,43.942
VCC_12V on Top Layer "Top Layer-No Net" (hatched 90Degree grid 0.2 track 0.203, pour order 1002): 27.305,14.097 16.891,14.097 14.224,14.097 11.118,17.203 11.176,17.261 11.176,30.607 9.017,30.607 9.017,25.781 9.017,12.7 9.017,12.065 27.305,12.065
GND on Top Layer "Top Layer-No Net" (hatched 90Degree grid 0.2 track 0.203, pour order 1004): 11.938,10.287 23.241,10.287 23.241,6.223 34.968,6.223 35.052,6.307 35.129,6.23 35.129,4.064 11.938,4.064
GND on Bottom Layer "Top Layer-No Net" (hatched 90Degree grid 0.2 track 0.254, remove dead copper, pour order 1001): 11.684,2.667 11.684,10.541 42.291,10.541 42.545,10.795 42.418,10.922 42.418,36.068 34.29,36.068 29.337,36.068 29.337,47.371 3.556,47.371 3.302,47.625 3.302,77.851 3.302,83.439 7.747,83.439 89.662,83.439 89.662,78.105 89.662,76.581 96.647,69.596 96.647,19.177 96.647,18.923 90.17,12.446 90.043,12.319 90.043,2.54

## Keep-outs
Keep-Out Layer:
  circle w0.254: c5,8.5 r2
  circle w0.254: c95,8.5 r2
  circle w0.254: c95,81.5 r2
  lines w0.254: 0,0 100,0 100,85 0,85 0,0

## Other copper
Top Layer:
  pour cut-out: 7.061,36.068 42.672,36.068 42.672,10.922 7.493,10.922
  pour cut-out: 7.061,36.068 7.061,46.558 7.112,46.609 29.464,46.609 29.464,36.068

## Silkscreen, mask and mechanical layers (free items; w line width, h text height)
Top Overlay:
  text "TX" at 52.197,81.153 h0.76 r90
  text "RX" at 54.864,81.153 h0.76 r90
  text "5V" at 46.99,81.026 h0.76 r90
  text "GND" at 49.53,81.026 h0.76 r90
  text "GPRSON" at 68.072,80.391 h0.76 r90
  text "LIGHT" at 70.993,80.391 h0.76 r90
  text "TX" at 73.279,80.391 h0.76 r90
  text "RX" at 75.819,80.391 h0.76 r90
  text "PWR" at 78.613,80.391 h0.76 r90
  text "GND" at 81.026,80.391 h0.76 r90
  text "12V" at 83.566,80.391 h0.76 r90
  text "12V" at 56.515,11.684 h1.52
  text "GND" at 61.214,11.684 h1.52
  text "A" at 71.501,11.684 h1.52
  text "A" at 79.502,11.684 h1.52
  text "B" at 86.36,11.684 h1.52
  text "B" at 74.93,11.557 h1.52
  text "GND" at 40.64,4.826 h0.76
  text "12V" at 26.416,4.445 h0.76

## Text inside footprints (layer, text, board x,y; h text height)
U2: Top Overlay "1" at 21.285,62.89 h0.76 r270; Top Overlay "3" at 21.285,58.318 h0.76 r270